# Altium PCB pcb.PcbDoc
Units mm, origin at the board's own origin, x right, y up, seen from the top; angles counter-clockwise.
Board outline 15.95 x 15.85 mm, 2 copper layers (Top Layer, Bottom Layer); 2 components, 6 nets, 16 pads, 0 vias.
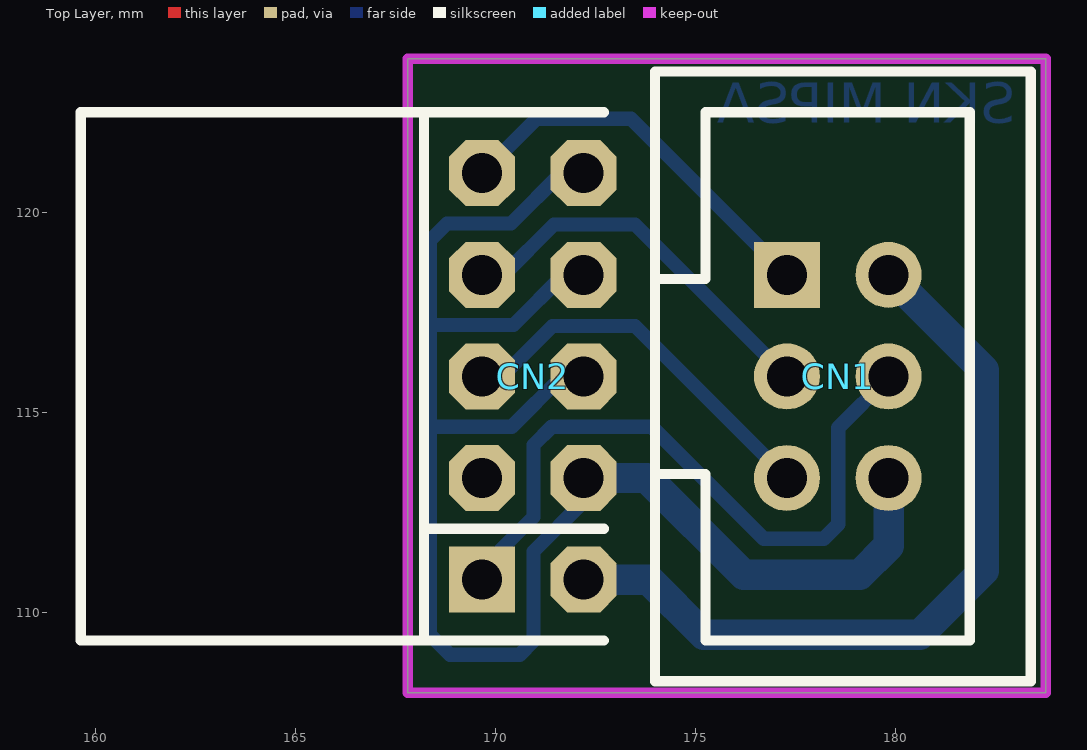
[diagram p0: Top Layer view]
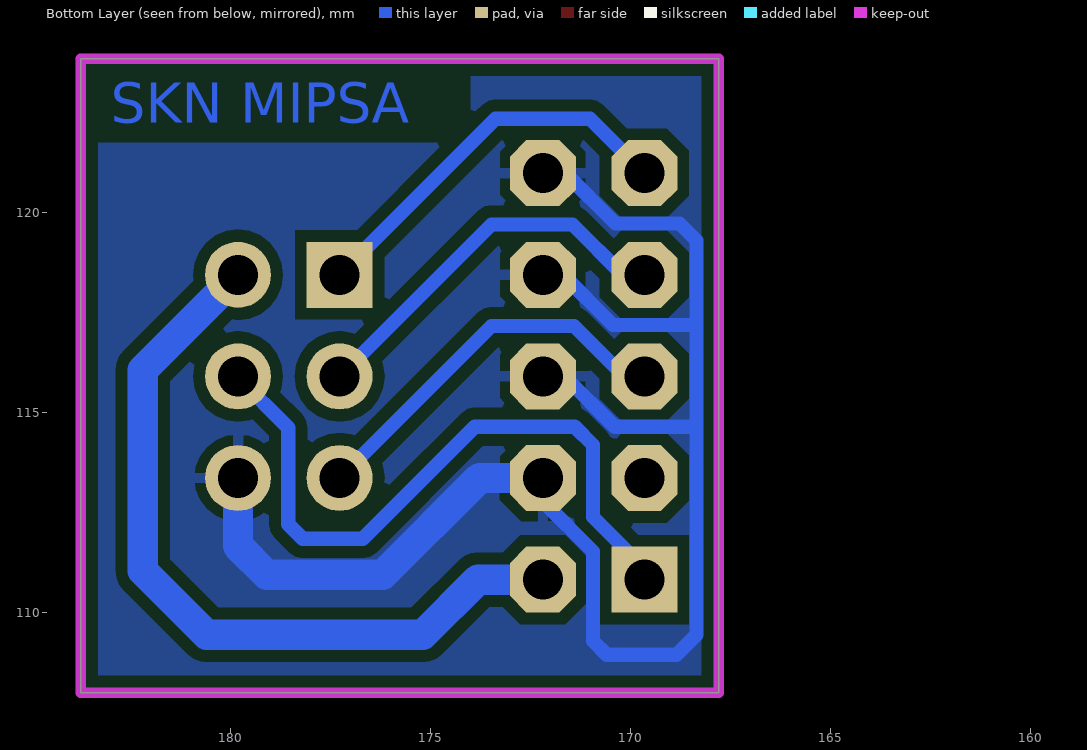
[diagram p1: Bottom Layer view, seen from below]

## Layer stack, top to bottom
Top Solder: solder mask 0.0102, Solder Resist, Dk 3.5
Top Layer: signal copper 0.0356
Dielectric1: dielectric 0.32, FR-4, Dk 4.8
Bottom Layer: signal copper 0.0356
Bottom Solder: solder mask 0.0102, Solder Resist, Dk 3.5

## Board outline
167.8,108 183.75,108 183.75,123.85 167.8,123.85

## Design rules (kind name [scope] priority, off if disabled: settings)
Clearance Clearance_1 [All vs InPolygon] p1: gap=0.3
Clearance [All] p2: gap=0.254
PolygonConnect [All] p1: connectstyle=Relief reliefconductorwidth=0.254 reliefentries=4 polygonreliefangle="90 Angle" airgapwidth=0.254
RoomDefinition sch [InComponentClass('sch')] p1: confinementstyle=ConfineIn formatcopy=TRUE lockcomponents=FALSE outline 158.7,107.5 184,107.5 184,124.45 158.7,124.45
RoutingVias [All] p1: holewidth=0.711 width=1.27 viastyle="Through Hole" minholewidth=0.711 minwidth=1.27 maxholewidth=0.711 maxwidth=1.27
SilkToSolderMaskClearance SilkscreenOverComponentPads [IsPad] p1: minsilkscreentomaskgap=0.254 clearancetoexposedcopper=TRUE
SolderMaskExpansion [All] p1: expansion=0.102
Width [All] p1: maxlimit=1.27 minlimit=0.254 preferedwidth=0.762
29 further rules are at their usual default settings.

## Components (designator, comment, footprint, x,y, rotation, side; value= is the part's Value field where it differs from the comment)
CN1 "AVR ISP Interface" IDC6 177.28,118.45 r270 top
CN2 "AVR ISP Kanda Interface" GP_5x2H_F 172.2,110.83 r90 top

## Footprints (in the part's own frame and the unit in brackets; to place one, negate y for a bottom-side part, rotate by r counter-clockwise, add the part's x,y. Pads: shape width x height; smd on the part's side, far side on the other; paste and mask are expansions set on the pad)
GP_5x2H_F [mil]
  rect 65x65 hole 39.37: 1(0,100)
  oct 65x65 hole 39.37: 2(0,0) 3(100,100) 4(100,0) 5(200,100) 6(200,0) 7(300,100) 8(300,0) 9(400,100) 10(400,0)
  silkscreen extent -60,-20 460,495, body extent -59,-11 461,492, height 198
IDC6 [mil] "2.54mm, 6 Pin IDC Male Connector"
  rect 65x65 hole 39.37: 1(0,0)
  round 65 hole 39.37: 2(0,100) 3(100,0) 4(100,100) 5(200,0) 6(200,100)
  silkscreen extent -200,-130 400,240, body extent -201,-130 399,242, height 358

## Part data
CN1: "ISP Programming Header for AVR MCU's"
CN2: "Kanda ISP Programming Header for AVR MCU's"

## Nets (pads, with @x,y where several pads share a name; then routed paths per layer and width w, separated by ;. In a path a pad name is that pad's centre, name@x,y a point inside that pad or via, vN(x,y) a via of type N, cw(c..) or ccw(c..) an arc to the next point about the centre after c; other vN are vias at no path point)
GND: CN1.6 CN2.4 CN2.6 CN2.8 CN2.10 | length 41.3
  Bottom Layer w0.356: CN2.4 172.2,112.788 170.943,111.531 170.943,109.293 170.6,108.95 168.859,108.95 168.359,109.45 168.359,114.65 ; CN2.6 171.66,115.91 170.403,114.653 168.362,114.653 168.359,114.65 ; CN2.8 171.7,118.45 170.443,117.193 168.416,117.193 168.359,117.25 ; CN2.10 171.64,120.99 170.383,119.733 168.783,119.733 168.359,119.309 168.359,117.25 ; 168.359,114.65 168.359,117.25
  Bottom Layer w0.762: CN2.4 173.78,113.37 176.2,110.95 179.1,110.95 179.82,111.67 CN1.6
NetCN1_1: CN1.1 CN2.9 | length 9.8
  Bottom Layer w0.356: CN2.9 171.02,122.35 173.38,122.35 CN1.1
NetCN1_3: CN1.3 CN2.7 | length 9.7
  Bottom Layer w0.356: CN2.7 170.2,118.45 171.457,119.707 173.483,119.707 CN1.3
NetCN1_4: CN1.4 CN2.1 | length 17.2
  Bottom Layer w0.356: CN2.1 169.66,111.11 170.943,112.393 170.943,114.193 171.4,114.65 173.9,114.65 176.7,111.85 178.2,111.85 178.563,112.213 178.563,114.627 179.82,115.885 CN1.4
NetCN1_5: CN1.5 CN2.5 | length 9.7
  Bottom Layer w0.356: CN2.5 170.16,115.91 171.417,117.167 173.483,117.167 CN1.5
VCC: CN1.2 CN2.2 | length 19.6
  Bottom Layer w0.762: CN2.2 173.82,110.83 175.2,109.45 180.6,109.45 182.2,111.05 182.2,116.07 CN1.2
pads on no net: CN2.3

## Polygon pours and split planes (outlines as drawn)
GND on Bottom Layer "Top Layer-No Net" (solid, pour order 2): 183.75,123.85 168,123.85 168,108 183.75,108

## Keep-outs
Keep-Out Layer:
  the board outline again, w0.254

## Other copper
Bottom Layer:
  text "SKN MIPSA" at 183,122.25 h1

## Silkscreen, mask and mechanical layers (free items; w line width, h text height)
Mechanical 16:
  lines w0.127: 27.66,70.9 32.74,70.9 ; 27.66,119.16 32.74,119.16 ; 27.66,167.42 32.74,167.42 ; 100.685,22.64 100.685,27.72 ; 100.685,210.6 100.685,215.68 ; 164.82,27.72 200.38,27.72 ; 173.71,22.64 173.71,27.72 ; 173.71,210.6 173.71,215.68 ; 194.767,27.745 194.792,27.72 ; 209.61,27.745 209.61,52.993 314.68,52.993 ; 209.635,29.904 314.68,29.904 ; 209.635,45.475 314.655,45.475 ; 209.66,37.499 314.655,37.499 ; 228.59,29.904 228.59,37.499 ; 228.61,33.486 314.655,33.486 ; 246.735,210.6 246.735,215.68 ; 260.131,29.955 260.131,37.474 ; 289.06,37.499 289.06,52.993 ; 304.085,45.475 304.085,52.99 ; 314.68,70.9 319.76,70.9 ; 314.68,119.16 319.76,119.16 ; 314.68,167.42 319.76,167.42 ; 314.68,52.993 314.68,210.6 32.74,210.6 32.74,27.72 314.68,27.72 314.68,52.993 ; 27.66,22.64 319.76,22.64 319.76,215.68 27.66,215.68 27.66,22.64
  text "1" at 63.906,212.251 h1.78
  text "2" at 136.55,212.251 h1.78
  text "3" at 209.702,212.251 h1.78
  text "4" at 282.6,212.251 h1.78
  text "A" at 29.565,189.239 h1.78
  text "A" at 316.585,189.239 h1.78
  text "B" at 29.565,141.182 h1.78
  text "B" at 316.585,141.182 h1.78
  text "C" at 29.565,92.668 h1.78
  text "C" at 316.585,92.668 h1.78
  text "PROJECT NAME:" at 210.524,50.986 h1.14
  text "REVISION:" at 289.974,50.986 h1.14
  text "A4" at 307.435,47.915 h2.29
  text "Avr_IDC6_IDC10.PrjPcb" at 229.235,47.625 h2.54
  text "1.0.0" at 294.005,46.99 h1.78
  text "D" at 29.565,44.662 h1.78
  text "PROJECT NUMBER:" at 289.949,43.468 h1.14
  text "TITLE:" at 210.499,43.392 h1.14
  text "AVR IDC6 <-> IDC10 Converter" at 222.885,39.37 h2.16
  text "ONW-000" at 297.435,39.291 h1.78
  text "DATE:" at 210.626,35.289 h1.14
  text "Pawel Poryzala" at 278.394,34.806 h1.52
  text "1" at 239.813,34.73 h1.52
  text "DRAWN BY:" at 261.198,34.73 h1.52
  text "of" at 243.496,34.654 h1.52
  text "1" at 247.915,34.654 h1.52
  text "SHEET" at 230.034,34.629 h1.52
  text "04/03/2013" at 211.794,31.174 h1.52
  text "Pawel Poryzala" at 278.419,31.174 h1.52
  text "CHECKED BY:" at 261.172,31.047 h1.52
  text ".PCB_FILE_NAME_NO_PATH" at 229.932,31.022 h1.52
  text "THIS DRAWING IS THE COPYRIGHT AND PROPERTY OF PI PROJECT SP. Z O.O." at 230.385,28.24 h1.02
  text "1" at 63.906,24.291 h1.78
  text "2" at 136.55,24.291 h1.78